# Altium PCB MB1520.PcbDoc (part 3 of 7)
Units mm, origin at the board's own origin, x right, y up, seen from the top; angles counter-clockwise.
Board outline 159 x 88 mm, 6 copper layers (Top Layer, Signal Layer 1, Signal Layer 2, Signal Layer 3, Signal Layer 4, Bottom Layer), stack 1.572 mm thick; 473 components, 377 nets, 1832 pads, 1378 vias.
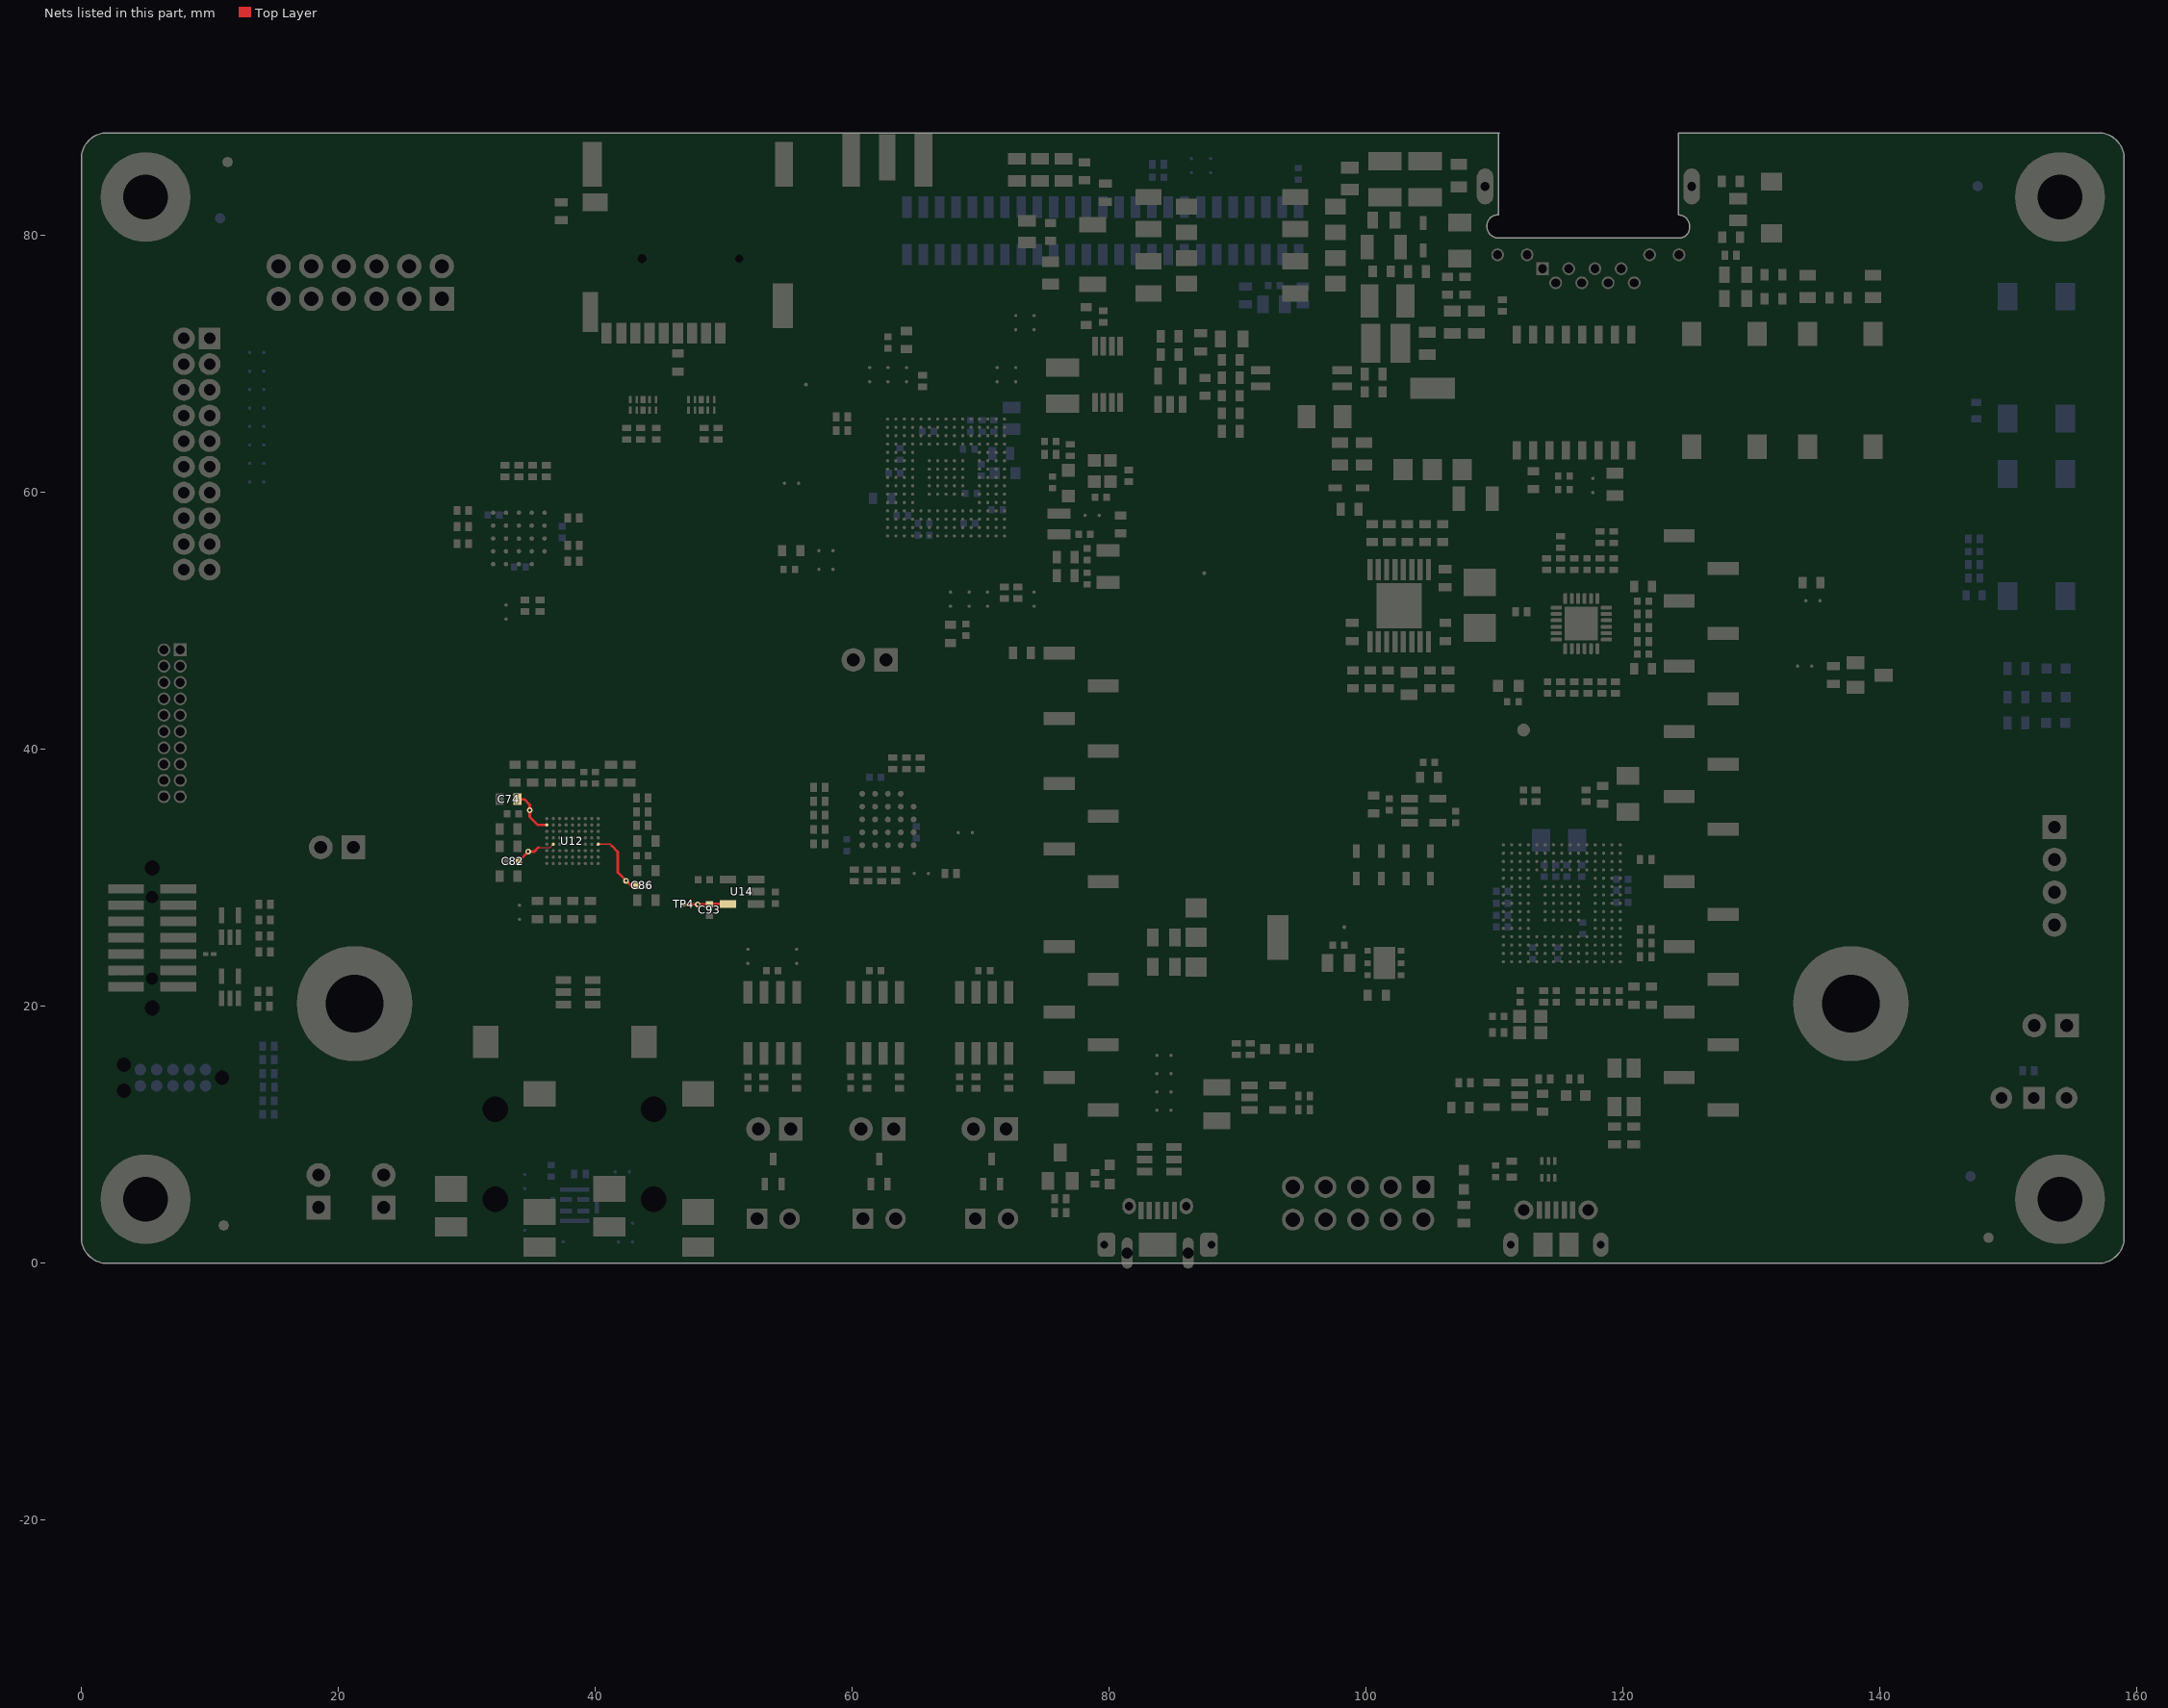
[diagram p6: the nets of this part, all layers, seen from the top]

## Part data (continued)
D8 D9 D10 D11: library part MCD-00034, Manufacturer=STMICROELECTRONICS, BMS_Part_Number=9151097, ComponentLink1Description=Datasheet, ComponentLink1URL=http://tunmcdsvn.tun.st.com/Component_Datasheet_Library/Trunk/Diodes/STM_Diode_BAT60JFILM-SOD323, Internal_Part_Number=MCD-00034, Manufacturer_Part_Number=BAT60JFILM, Part_Type=Diode, Provided_By="SUBCO with ST control", Status=Released
H1 H2 H3 H4: library part MCD-00328, "POSITION HOLE C7D3R5", Manufacturer=n/a, ComponentLink1Description=Datasheet, Internal_Part_Number=MCD-00328, Manufacturer_Part_Number=n/a, Part_Type=Mechanical, Provided_By=n/a, Status=Released
JP1: library part MCD-00683, "Header, 2x1, 2,54mm, VR, TH, Height 5.84mm/2.54mm - Shunt Fitted by default", Manufacturer=SAMTEC, Manufacturer_Part_Number=TSW-102-07-x-S, ComponentLink1Description=Datasheet, ComponentLink1URL=http://tunmcdsvn.tun.st.com/Component_Datasheet_Library/Trunk/Connectors/Samtec_TSW-HTSW-series, Internal_Part_Number=MCD-00683, Part_Type=Connector, Provided_By=SUBCO, Status=Released
JP7: library part MCD-00312, "Header, 5x2, 2.54mm, VR, TH, Height 6mm/3mm", Manufacturer=JIUBABA, Manufacturer_Part_Number=PHFS25-12-10-G0B115-T-1, ComponentLink1Description=Datasheet, ComponentLink1URL=http://tunmcdsvn.tun.st.com/Component_Datasheet_Library/Trunk/Connectors/Jiubaba_PHFS25_12XXXXXXXXX1, ECCN_EU=n/a, ECCN_US=n/a, Internal_Part_Number=MCD-00312, Part_Type=Connector, Provided_By=SUBCO, Status=Released
L1: library part MCD-01109, "Power Inductor, 5.6uH, 0.2R, ME3220-562ML", Manufacturer=COILCRAFT, Manufacturer_Part_Number=ME3220-562ML, ComponentLink1Description=Datasheet, ComponentLink1URL=http://tunmcdsvn.tun.st.com/Component_Datasheet_Library/Trunk/Inductors/CoilCraft_SMT%20Power%20Inductor%20ME3220/CoilCraft_SMT%20Power%20Inductor%20ME3220.pdf, Internal_Part_Number=MCD-01109, Part_Type=Inductor, Provided_By=SUBCO, Status="Footprint available"
L2: library part MCD-01431, "Ferrite Bead 18 ohm@100MHz 0603", Manufacturer="TAIYO YUDEN", Manufacturer_Part_Number=FBMJ1608HM180NTR, Package=L0603, ComponentLink1Description=Datasheet, ComponentLink1URL=http://tunmcdsvn.tun.st.com/Component_Datasheet_Library/Trunk/Inductors/TaiyoYuden_Bead_FBA,%20FBR%20Series/TaiyoYuden_Bead_FBA,%20FBR%20Series.pdf, Internal_Part_Number=MCD-01431, Part_Type=Inductor, Provided_By=SUBCO, Status=Checked
L3: library part MCD-01110, "Inductor 2.2uH, 2x1.6x0.9mm", Manufacturer=MURATA, Manufacturer_Part_Number=LQM2MPN2R2NG0, ComponentLink1Description=Datasheet, ComponentLink1URL=http://tunmcdsvn.tun.st.com/Component_Datasheet_Library/Trunk/Inductors/Murata_inductor_LQM2MPN/Murata_inductor_LQM2MPN.pdf, ECCN_EU=n/a, ECCN_US=n/a, Internal_Part_Number=MCD-01110, Part_Type=Inductor, Provided_By=SUBCO, Status="Footprint available"
L4 L5: library part MCD-00047, "SMD Chip ferrite bead, 600R@100MHz +/-25%, 350mA, 500mohm DC, 0603, T=0.8mm", Manufacturer=TAI-TECH, Manufacturer_Part_Number=FCM1608KF-601T03, ComponentLink1Description=Datasheet, ComponentLink1URL=http://tunmcdsvn.tun.st.com/Component_Datasheet_Library/Trunk/Inductors/TaiTech_Bead_FCM1608_series, Internal_Part_Number=MCD-00047, Part_Type=Inductor, Provided_By=SUBCO, Status=Released
  L4: ECCN_EU=n/a, ECCN_US=n/a
LD1 LD4 LD8: library part MCD-00050, "LED, Green, 0603", Manufacturer=EVERLIGHT, Manufacturer_Part_Number=19-213SYGC/S530-E2/TR8, Package="LED 0603", ComponentLink1Description=Datasheet, ComponentLink1URL=http://tunmcdsvn.tun.st.com/Component_Datasheet_Library/Trunk/Display/Everlight_SMD-LED-GREEN_19-213SYGC-S530-XX-TR8-v3.doc, Internal_Part_Number=MCD-00050, Part_Type=Display, Provided_By=SUBCO, Status=Released
LD2 LD7: library part MCD-00049, "LED, Red, 0603", Manufacturer=EVERLIGHT, Manufacturer_Part_Number=19-213-R6C-AP1Q2B/3T, Package="LED 0603", ComponentLink1Description=Datasheet, ComponentLink1URL=http://tunmcdsvn.tun.st.com/Component_Datasheet_Library/Trunk/Display/Everlight_SMD-LED-RED_19-213-R6C-AP1Q2B-3T-V3.doc, Internal_Part_Number=MCD-00049, Part_Type=Display, Provided_By=SUBCO, Status=Released
LD3: library part MCD-00587, "LED Red, 0603 SMD, 2V Forward Voltage", Alternate_Manufacturer="OSRAM OPTO SEMICONDUCTORS", Alternate_Manufacturer_Part_Number="LS Q976-NR-1", Manufacturer=VISHAY, Manufacturer_Part_Number=VLMS1300-GS08, Package="LED 0603", ComponentLink1Description=Datasheet, ComponentLink1URL=http://tunmcdsvn.tun.st.com/Component_Datasheet_Library/Trunk/Display/VISHAY_LED_RED_VLMS1300-GS08, Internal_Part_Number=MCD-00587, Order_Code_Digikey=VLMS1300-GS08CT-ND, Order_Code_Farnell=2078728, Part_Type=Display, Provided_By=SUBCO, Status=Released
LD5: library part MCD-00589, "LED Green, 0603 SMD, Fw Voltage = 2.8V - 3.6V", Alternate_Manufacturer="OSRAM OPTO SEMICONDUCTORS", Alternate_Manufacturer_Part_Number="LG Q396-PS-35", Manufacturer=VISHAY, Manufacturer_Part_Number=VLMTG1300-GS08, Package="LED 0603", ComponentLink1Description=Datasheet, ComponentLink1URL=http://tunmcdsvn.tun.st.com/Component_Datasheet_Library/Trunk/Display/VISHAY_LED_GREEN_VLMTG1300-GS08, Internal_Part_Number=MCD-00589, Order_Code_Digikey=VLMTG1300-GS08CT-ND, Order_Code_Farnell=2251490, Order_Code_RS=7730452, Part_Type=Display, Provided_By=SUBCO, Status=Checked
LD6: library part MCD-00051, "LED Bicolor", Alternate_Manufacturer=EVERLUCK, Alternate_Manufacturer_Part_Number=LE-RGW35280, Manufacturer="AVAGO TECHNOLOGIES", Manufacturer_Part_Number=HSMF-A201-A00J1, ComponentLink1Description=Datasheet, ComponentLink1URL=http://tunmcdsvn.tun.st.com/Component_Datasheet_Library/Trunk/Display/Avago_LED-SMC_HSMx-A2xx-02Feb2012, Internal_Part_Number=MCD-00051, Part_Type=Display, Provided_By=SUBCO, Status=Released
P1: library part MCD-00308, "Socket, 6x2, 2.54mm, TH, RA, Height 8.51mm/7.62mm", Manufacturer=SAMTEC, Manufacturer_Part_Number=SSW-106-02-F-D-RA, ComponentLink1Description=Datasheet, ComponentLink1URL=http://tunmcdsvn.tun.st.com/Component_Datasheet_Library/Trunk/Connectors/Samtec_SSW_smt_series, Internal_Part_Number=MCD-00308, Part_Type=Connector, Provided_By=SUBCO, Status=Released
P2: library part MCD-00309, "Socket 10x2, 2.00mm, RA, TH, Height 6.35mm/2.29mm", Alternate_Manufacturer=JIUBABA, Alternate_Manufacturer_Part_Number=FH200020C-12300, Manufacturer=SAMTEC, Manufacturer_Part_Number=SQT-110-01-F-D-RA, ComponentLink1Description=Datasheet, ComponentLink1URL=http://tunmcdsvn.tun.st.com/Component_Datasheet_Library/Trunk/Connectors/Samtec_SQT_series, Internal_Part_Number=MCD-00309, Part_Type=Connector, Provided_By=SUBCO, Status=Released
Q1: library part MCD-00073, "NPN Bipolar Transistor", Alternate_Manufacturer="ON SEMICONDUCTOR", Alternate_Manufacturer_Part_Number="MMBT2222ALT1G / MMBT2222ALT3G", Manufacturer_Part_Number=BSR14, ComponentLink1Description=Datasheet, ComponentLink1URL=http://tunmcdsvn.tun.st.com/Component_Datasheet_Library/Trunk/IC/NXP_Transistor_BSR14, Internal_Part_Number=MCD-00073, Manufacturer="ON SEMICONDUCTOR", Part_Type=IC, Provided_By=SUBCO, Status=Released
R1 R10 R11 R18 R33 R42: library part MCD-00179, "Resistor,0R,0805,5%", Manufacturer=YAGEO, Manufacturer_Part_Number=RC0805JR-070RL, Package=R0805, ComponentLink1Description=Datasheet, ComponentLink1URL=http://tunmcdsvn.tun.st.com/Component_Datasheet_Library/Trunk/Resistors/Yageo_Resistor_RC0805-series, Internal_Part_Number=MCD-00179, Part_Type=Resistor, Provided_By=SUBCO, Status=Released
R2 R61 R137 R138 R139: library part MCD-00056, "Resistor,0R,0603,5%,1/10W", Manufacturer=YAGEO, Manufacturer_Part_Number=RC0603JR-070RL, Package=R0603, ComponentLink1Description=Datasheet, ComponentLink1URL=http://tunmcdsvn.tun.st.com/Component_Datasheet_Library/Trunk/Resistors/Yageo_Resistor_RC0603-series, Internal_Part_Number=MCD-00056, Part_Type=Resistor, Status=Released
  R2 R61: Provided_By=SUBCO
  R137 R138: ECCN_EU=n/a, ECCN_US=n/a, Initial_Board_Reference=MB1274, Provided_By=subcon
  R139: ECCN_EU=NEC, ECCN_US=EAR99, Provided_By=SUBCO
R3 R8 R23 R44: library part MCD-00220, "Resistor,10K,0603,1%,1/10W", Manufacturer=YAGEO, Manufacturer_Part_Number=RC0603FR-0710KL, Package=R0603, ComponentLink1Description=Datasheet, ComponentLink1URL=http://tunmcdsvn.tun.st.com/Component_Datasheet_Library/Trunk/Resistors/Yageo_Resistor_RC0603-series, Internal_Part_Number=MCD-00220, Part_Type=Resistor, Provided_By=SUBCO, Status=Released
  R3: ECCN_EU=NEC, ECCN_US=EAR99
R4: library part MCD-01115, "Resistor,68R,0805,1%", Manufacturer=YAGEO, Manufacturer_Part_Number=RC0805FR-0768RL, Package=R0805, ComponentLink1Description=Datasheet, ComponentLink1URL=http://tunmcdsvn.tun.st.com/Component_Datasheet_Library/Trunk/Resistors/Yageo_Resistor_RC0805-series/Yageo_Resistor_RC0805-series.pdf, Internal_Part_Number=MCD-01115, Part_Type=Resistor, Provided_By=SUBCO, Status="Footprint available"
R5: library part MCD-01114, "Resistor,200R,1206,1%", Manufacturer=ROHM, Manufacturer_Part_Number=LTR18EZPF2000, Package=R1206, ComponentLink1Description=Datasheet, ComponentLink1URL=http://tunmcdsvn.tun.st.com/Component_Datasheet_Library/Trunk/Resistors/ROHM_Resistor_LTR-series/ROHM_Resistor_LTR-series.pdf, Internal_Part_Number=MCD-01114, Part_Type=Resistor, Provided_By=SUBCO, Status="Footprint available"
R6 R13 R132 R141: library part MCD-00062, "Resistor,330R,0402,1%,1/16W", Manufacturer=YAGEO, Manufacturer_Part_Number=RC0402FR-07330RL, Package=R0402, ComponentLink1Description=Datasheet, ComponentLink1URL=http://tunmcdsvn.tun.st.com/Component_Datasheet_Library/Trunk/Resistors/Yageo_Resistor_RC0402-series, Internal_Part_Number=MCD-00062, Part_Type=Resistor, Provided_By=SUBCO, Status=Released
R7: library part MCD-01113, "Resistor,15R,0805,1%", Manufacturer=YAGEO, Manufacturer_Part_Number=RC0805FR-0715RL, Package=R0805, ComponentLink1Description=Datasheet, ComponentLink1URL=http://tunmcdsvn.tun.st.com/Component_Datasheet_Library/Trunk/Resistors/Yageo_Resistor_RC0805-series/Yageo_Resistor_RC0805-series.pdf, Internal_Part_Number=MCD-01113, Part_Type=Resistor, Provided_By=SUBCO, Status="Footprint available"
R9 R12 R14 R15: library part MCD-01112, "Resistor,75R,0805,1%", Manufacturer=YAGEO, Manufacturer_Part_Number=RC0805FR-0775RL, Package=R0805, ComponentLink1Description=Datasheet, ComponentLink1URL=http://tunmcdsvn.tun.st.com/Component_Datasheet_Library/Trunk/Resistors/Yageo_Resistor_RC0805-series/Yageo_Resistor_RC0805-series.pdf, Internal_Part_Number=MCD-01112, Part_Type=Resistor, Provided_By=SUBCO, Status="Footprint available"
R16: library part MCD-00166, "Resistor,120K,0402,1%,1/16W", Manufacturer=YAGEO, Manufacturer_Part_Number=RC0402FR-07120KL, Package=R0402, ComponentLink1Description=Datasheet, ComponentLink1URL=http://tunmcdsvn.tun.st.com/Component_Datasheet_Library/Trunk/Resistors/Yageo_Resistor_RC0402-series, Internal_Part_Number=MCD-00166, Part_Type=Resistor, Provided_By=SUBCO, Status="Footprint available"
R17: library part MCD-01111, "Resistor,10R,0805,1%,Stackpole,1/4W", Manufacturer=STACKPOLE, Manufacturer_Part_Number=RNCP0805FTD10R0, Package=R0805, ComponentLink1Description=Datasheet, ComponentLink1URL=http://tunmcdsvn.tun.st.com/Component_Datasheet_Library/Trunk/Resistors/Stackpole_Resisteor_RNCP%20Series/Stackpole_Resisteor_RNCP%20Series.pdf, Internal_Part_Number=MCD-01111, Part_Type=Resistor, Provided_By=SUBCO, Status="Footprint available"
R19 R21: library part MCD-00384, "Resistor,13K,0603,1%,1/10W", Manufacturer=YAGEO, Manufacturer_Part_Number=RC0603FR-0713KL, Package=R0603, ComponentLink1Description=Datasheet, ComponentLink1URL=http://tunmcdsvn.tun.st.com/Component_Datasheet_Library/Trunk/Resistors/Yageo_Resistor_RC0603-series, Internal_Part_Number=MCD-00384, Part_Type=Resistor, Provided_By=SUBCO, Status=Released
R20: library part MCD-00422, "Resistor,20K,0603,1%,1/10W", Manufacturer=YAGEO, Manufacturer_Part_Number=RC0603FR-0720KL, Package=R0603, ComponentLink1Description=Datasheet, ComponentLink1URL=http://tunmcdsvn.tun.st.com/Component_Datasheet_Library/Trunk/Resistors/Yageo_Resistor_RC0603-series, Internal_Part_Number=MCD-00422, Part_Type=Resistor, Provided_By=SUBCO, Status=Released
R22 R26 R72 R134: library part MCD-00070, "Resistor,1K,0603,1%,1/10W", Manufacturer=YAGEO, Manufacturer_Part_Number=RC0603FR-071KL, Package=R0603, ComponentLink1Description=Datasheet, ComponentLink1URL=http://tunmcdsvn.tun.st.com/Component_Datasheet_Library/Trunk/Resistors/Yageo_Resistor_RC0603-series, Internal_Part_Number=MCD-00070, Part_Type=Resistor, Provided_By=SUBCO, Status=Released
R24 R25 R32 R37 R38 R39 R40 R45 R46 R48 R52 R53 R56 R58 R59 R60 R66 R82 R83 R87 R91 R93 R95 R96 R98 R99 R100 R101: library part MCD-00455, "Resistor,33R,0402,1%,1/16W", Manufacturer=YAGEO, Manufacturer_Part_Number=RC0402FR-0733RL, Package=R0402, ComponentLink1Description=Datasheet, ComponentLink1URL=http://tunmcdsvn.tun.st.com/Component_Datasheet_Library/Trunk/Resistors/Yageo_Resistor_RC0402-series, Internal_Part_Number=MCD-00455, Part_Type=Resistor, Provided_By=SUBCO, Status=Released
  R56 R58 R59: ECCN_EU=NEC, ECCN_US=EAR99
R27 R28 R29 R30 R31 R117 R125 R135: library part MCD-00063, "Resistor,47K,0402,1%,1/16W", Manufacturer=YAGEO, Manufacturer_Part_Number=RC0402FR-0747KL, Package=R0402, ComponentLink1Description=Datasheet, ComponentLink1URL=http://tunmcdsvn.tun.st.com/Component_Datasheet_Library/Trunk/Resistors/Yageo_Resistor_RC0402-series, Internal_Part_Number=MCD-00063, Part_Type=Resistor, Provided_By=SUBCO, Status=Released
R34: library part MCD-01118, "Resistor,56R,0805,1%", Manufacturer=YAGEO, Manufacturer_Part_Number=RC0805FR-0756RL, Package=R0805, ComponentLink1Description=Datasheet, ComponentLink1URL=http://tunmcdsvn.tun.st.com/Component_Datasheet_Library/Trunk/Resistors/Yageo_Resistor_RC0805-series/Yageo_Resistor_RC0805-series.pdf, Internal_Part_Number=MCD-01118, Part_Type=Resistor, Provided_By=SUBCO, Status="Footprint available"
R35 R36: library part MCD-00485, "Resistor,51R,0402,1%,1/16W", Manufacturer=YAGEO, Manufacturer_Part_Number=RC0402FR-0751RL, Package=R0402, ComponentLink1Description=Datasheet, ComponentLink1URL=http://tunmcdsvn.tun.st.com/Component_Datasheet_Library/Trunk/Resistors/Yageo_Resistor_RC0402-series, Internal_Part_Number=MCD-00485, Part_Type=Resistor, Provided_By=SUBCO, Status=Released
R41 R49 R50 R51 R57 R63 R64 R65 R67 R70 R71 R81 R94 R102 R105 R115 R120 R122 R124 R127 R129 R149 R154: library part MCD-00053, "Resistor,10K,0402,1%,1/16W", Manufacturer=YAGEO, Manufacturer_Part_Number=RC0402FR-0710KL, Package=R0402, ComponentLink1Description=Datasheet, ComponentLink1URL=http://tunmcdsvn.tun.st.com/Component_Datasheet_Library/Trunk/Resistors/Yageo_Resistor_RC0402-series, Internal_Part_Number=MCD-00053, Part_Type=Resistor, Provided_By=SUBCO, Status=Released
  R49 R50 R51 R57 R65 R67 R81 R102: ECCN_EU=NEC, ECCN_US=EAR99
R43: library part MCD-01119, "Resistor,0.47R,1206,1%", Manufacturer=YAGEO, Manufacturer_Part_Number=RL1206FR-070R47L, Package=R1206, ComponentLink1Description=Datasheet, ComponentLink1URL=http://tunmcdsvn.tun.st.com/Component_Datasheet_Library/Trunk/Resistors/Yageo_Resistor_RL-series/Yageo_Resistor_RL-series.pdf, Internal_Part_Number=MCD-01119, Part_Type=Resistor, Provided_By=SUBCO, Status="Footprint available"
R47 R144 R145: library part MCD-00225, "Resistor,510R,0603,1%,1/10W", Manufacturer=YAGEO, Manufacturer_Part_Number=RC0603FR-07510RL, Package=R0603, ComponentLink1Description=Datasheet, ComponentLink1URL=http://tunmcdsvn.tun.st.com/Component_Datasheet_Library/Trunk/Resistors/Yageo_Resistor_RC0603-series, Internal_Part_Number=MCD-00225, Part_Type=Resistor, Provided_By=SUBCO, Status=Released
R54 R62: library part MCD-00181, "Resistor,0R,0603,ULO", Manufacturer=ROHM, Manufacturer_Part_Number=PMR03EZPJ000, Package=R0603, ComponentLink1Description=Datasheet, ComponentLink1URL=http://tunmcdsvn.tun.st.com/Component_Datasheet_Library/Trunk/Resistors/ROHM_ULtra_low_Ohmic_Resistor_PMR10EZPJ000, Internal_Part_Number=MCD-00181, Part_Type=Resistor, Provided_By=SUBCO, Status=Released
R55 R90 R92: library part MCD-00068, "Resistor,1K5,0402,1%,1/16W", Manufacturer=YAGEO, Manufacturer_Part_Number=RC0402FR-071K5L, Package=R0402, ComponentLink1Description=Datasheet, ComponentLink1URL=http://tunmcdsvn.tun.st.com/Component_Datasheet_Library/Trunk/Resistors/Yageo_Resistor_RC0402-series, Internal_Part_Number=MCD-00068, Part_Type=Resistor, Provided_By=SUBCO, Status=Released
  R55: ECCN_EU=NEC, ECCN_US=EAR99
R68 R88 R97 R111 R140 R146: library part MCD-00119, "Resistor,100R,0402,1%,1/16W", Manufacturer=YAGEO, Manufacturer_Part_Number=RC0402FR-07100RL, Package=R0402, ComponentLink1Description=Datasheet, ComponentLink1URL=http://tunmcdsvn.tun.st.com/Component_Datasheet_Library/Trunk/Resistors/Yageo_Resistor_RC0402-series, Internal_Part_Number=MCD-00119, Part_Type=Resistor, Provided_By=SUBCO, Status=Released
R69: library part MCD-01116, "Resistor,124K,0603,1%", Manufacturer=YAGEO, Manufacturer_Part_Number=RC0603FR-07124KL, Package=R0603, ComponentLink1Description=Datasheet, ComponentLink1URL=http://tunmcdsvn.tun.st.com/Component_Datasheet_Library/Trunk/Resistors/Yageo_Resistor_RC0603-series/Yageo_Resistor_RC0603-series.pdf, Internal_Part_Number=MCD-01116, Part_Type=Resistor, Provided_By=SUBCO, Status="Footprint available"
R73: library part MCD-00257, "Resistor,1M,0603,1%,1/10W", Manufacturer=YAGEO, Manufacturer_Part_Number=RC0603FR-071ML, Package=R0603, ComponentLink1Description=Datasheet, ComponentLink1URL=http://tunmcdsvn.tun.st.com/Component_Datasheet_Library/Trunk/Resistors/Yageo_Resistor_RC0603-series, Internal_Part_Number=MCD-00257, Part_Type=Resistor, Provided_By=SUBCO, Status=Released
R74: library part MCD-01117, "Resistor,2K,0805,1%", Manufacturer=YAGEO, Manufacturer_Part_Number=RC0805FR-072KL, Package=R0805, ComponentLink1Description=Datasheet, ComponentLink1URL=http://tunmcdsvn.tun.st.com/Component_Datasheet_Library/Trunk/Resistors/Yageo_Resistor_RC0805-series/Yageo_Resistor_RC0805-series.pdf, Internal_Part_Number=MCD-01117, Part_Type=Resistor, Provided_By=SUBCO, Status="Footprint available"
R75: library part MCD-00522, "Resistor,75K,0603,1%,1/10W", Manufacturer=YAGEO, Manufacturer_Part_Number=RC0603FR-0775KL, Package=R0603, ComponentLink1Description=Datasheet, ComponentLink1URL=http://tunmcdsvn.tun.st.com/Component_Datasheet_Library/Trunk/Resistors/Yageo_Resistor_RC0603-series, Internal_Part_Number=MCD-00522, Part_Type=Resistor, Provided_By=SUBCO, Status=Released
R76 R77 R78 R79: library part MCD-00565, "Resistor,49R9,0402,1%,1/16W", Manufacturer=YAGEO, Manufacturer_Part_Number=RC0402FR-0749R9L, Package=R0402, ComponentLink1Description=Datasheet, ComponentLink1URL=http://tunmcdsvn.tun.st.com/Component_Datasheet_Library/Trunk/Resistors/Yageo_Resistor_RC0402-series, Internal_Part_Number=MCD-00565, Part_Type=Resistor, Provided_By=SUBCO, Status=Released
R80: library part MCD-00723, "Resistor,12K1,0402,1%,1/16W", Manufacturer=YAGEO, Manufacturer_Part_Number=RC0402FR-0712K1L, Package=R0402, ComponentLink1Description=Datasheet, ComponentLink1URL=http://tunmcdsvn.tun.st.com/Component_Datasheet_Library/Trunk/Resistors/Yageo_Resistor_RC0402-series, ECCN_EU=NEC, ECCN_US=EAR99, Internal_Part_Number=MCD-00723, Part_Type=Resistor, Provided_By=SUBCO, Status=Released
R84 R85: library part MCD-00345, "Resistor,20R,0603,1%,1/10W", Manufacturer=YAGEO, Manufacturer_Part_Number=RC0603FR-0720RL, Package=R0603, ComponentLink1Description=Datasheet, ComponentLink1URL=http://tunmcdsvn.tun.st.com/Component_Datasheet_Library/Trunk/Resistors/Yageo_Resistor_RC0603-series, Internal_Part_Number=MCD-00345, Part_Type=Resistor, Provided_By=SUBCO, Status=Released
R86: library part MCD-00219, "Resistor,4K7,0603,1%,1/10W", Manufacturer=YAGEO, Manufacturer_Part_Number=RC0603FR-074K7L, Package=R0603, ComponentLink1Description=Datasheet, ComponentLink1URL=http://tunmcdsvn.tun.st.com/Component_Datasheet_Library/Trunk/Resistors/Yageo_Resistor_RC0603-series, Internal_Part_Number=MCD-00219, Part_Type=Resistor, Provided_By=SUBCO, Status=Released
R89: library part MCD-00185, "Resistor,3K,0402,1%,1/16W", Manufacturer=YAGEO, Manufacturer_Part_Number=RC0402FR-073KL, Package=R0402, ComponentLink1Description=Datasheet, ComponentLink1URL=http://tunmcdsvn.tun.st.com/Component_Datasheet_Library/Trunk/Resistors/Yageo_Resistor_RC0402-series, Internal_Part_Number=MCD-00185, Part_Type=Resistor, Provided_By=SUBCO, Status=Released
R103 R104 R106 R108 R110 R114 R147 R148 R150 R151 R152 R153: library part MCD-00189, "Resistor,22R,0402,1%,1/16W", Manufacturer=YAGEO, Manufacturer_Part_Number=RC0402FR-0722RL, Package=R0402, ComponentLink1Description=Datasheet, ComponentLink1URL=http://tunmcdsvn.tun.st.com/Component_Datasheet_Library/Trunk/Resistors/Yageo_Resistor_RC0402-series, Internal_Part_Number=MCD-00189, Part_Type=Resistor, Provided_By=SUBCO, Status=Released
R107: library part MCD-00055, "Resistor,2K7,0402,1%,1/16W", Manufacturer=YAGEO, Manufacturer_Part_Number=RC0402FR-072K7L, Package=R0402, ComponentLink1Description=Datasheet, ComponentLink1URL=http://tunmcdsvn.tun.st.com/Component_Datasheet_Library/Trunk/Resistors/Yageo_Resistor_RC0402-series, Internal_Part_Number=MCD-00055, Part_Type=Resistor, Provided_By=SUBCO, Status=Released
R109 R112 R113: library part MCD-00065, "Resistor,4K7,0402,1%,1/16W", Alternate_Manufacturer=YAGEO, Alternate_Manufacturer_Part_Number=RT0402FRE074K7L, Manufacturer_Part_Number=RC0402FR-074K7L, Package=R0402, ComponentLink1Description=Datasheet, ComponentLink1URL=http://tunmcdsvn.tun.st.com/Component_Datasheet_Library/Trunk/Resistors/Yageo_Resistor_RC0402-series, Internal_Part_Number=MCD-00065, Manufacturer=YAGEO, Part_Type=Resistor, Provided_By=SUBCO, Status=Released
R116 R128 R136: library part MCD-00052, "Resistor,0R,0402,5%,1/16W", Manufacturer=YAGEO, Manufacturer_Part_Number=RC0402JR-070RL, Package=R0402, ComponentLink1Description=Datasheet, ComponentLink1URL=http://tunmcdsvn.tun.st.com/Component_Datasheet_Library/Trunk/Resistors/Yageo_Resistor_RC0402-series, Internal_Part_Number=MCD-00052, Part_Type=Resistor, Provided_By=SUBCO, Status=Released
  R136: ECCN_EU=NEC, ECCN_US=EAR99
R118: library part MCD-00499, "Resistor,620R,0402,1%,1/16W", Manufacturer=YAGEO, Manufacturer_Part_Number=RC0402FR-07620RL, Package=R0402, ComponentLink1Description=Datasheet, ComponentLink1URL=http://tunmcdsvn.tun.st.com/Component_Datasheet_Library/Trunk/Resistors/Yageo_Resistor_RC0402-series, Internal_Part_Number=MCD-00499, Part_Type=Resistor, Provided_By=SUBCO, Status=Released
R119 R121 R123: library part MCD-00194, "Resistor,120R,0402,1%,1/16W", Manufacturer=YAGEO, Manufacturer_Part_Number=RC0402FR-07120RL, Package=R0402, ComponentLink1Description=Datasheet, ComponentLink1URL=http://tunmcdsvn.tun.st.com/Component_Datasheet_Library/Trunk/Resistors/Yageo_Resistor_RC0402-series, Internal_Part_Number=MCD-00194, Part_Type=Resistor, Provided_By=SUBCO, Status=Released
R126: library part MCD-00061, "Resistor,1K,0402,1%,1/16W", Manufacturer=YAGEO, Manufacturer_Part_Number=RC0402FR-071KL, Package=R0402, ComponentLink1Description=Datasheet, ComponentLink1URL=http://tunmcdsvn.tun.st.com/Component_Datasheet_Library/Trunk/Resistors/Yageo_Resistor_RC0402-series, Internal_Part_Number=MCD-00061, Part_Type=Resistor, Provided_By=SUBCO, Status=Released
R130 R131: library part MCD-00197, "Resistor,330R,0603,1%,1/10W", Manufacturer=YAGEO, Manufacturer_Part_Number=RC0603FR-07330RL, Package=R0603, BMS_Part_Number=9129729, ComponentLink1Description=Datasheet, ComponentLink1URL=http://tunmcdsvn.tun.st.com/Component_Datasheet_Library/Trunk/Resistors/Yageo_Resistor_RC0603-series, Internal_Part_Number=MCD-00197, Part_Type=Resistor, Provided_By=SUBCO, Status=Released
R133: library part MCD-00429, "Resistor,22K,0402,1%,1/16W", Manufacturer=YAGEO, Manufacturer_Part_Number=RC0402FR-0722KL, Package=R0402, ComponentLink1Description=Datasheet, ComponentLink1URL=http://tunmcdsvn.tun.st.com/Component_Datasheet_Library/Trunk/Resistors/Yageo_Resistor_RC0402-series, Internal_Part_Number=MCD-00429, Part_Type=Resistor, Provided_By=SUBCO, Status=Released
R142: library part MCD-00164, "Resistor,220K,0402,1%,1/16W", Manufacturer=YAGEO, Manufacturer_Part_Number=RC0402FR-07220KL, Package=R0402, ComponentLink1Description=Datasheet, ComponentLink1URL=http://tunmcdsvn.tun.st.com/Component_Datasheet_Library/Trunk/Resistors/Yageo_Resistor_RC0402-series, Internal_Part_Number=MCD-00164, Part_Type=Resistor, Provided_By=SUBCO, Status=Checked
R143: library part MCD-00508, "Resistor,680R,0603,1%,1/10W", Manufacturer=YAGEO, Manufacturer_Part_Number=RC0603FR-07680RL, Package=R0603, ComponentLink1Description=Datasheet, ComponentLink1URL=http://tunmcdsvn.tun.st.com/Component_Datasheet_Library/Trunk/Resistors/Yageo_Resistor_RC0603-series, ECCN_EU=NEC, ECCN_US=EAR99, Internal_Part_Number=MCD-00508, Part_Type=Resistor, Provided_By=SUBCO, Status=Released
SB1 SB2 SB3 SB4 SB5 SB6 SB7 SB8 SB9 SB10 SB11 SB12 SB13 SB14 SB15 SB16 SB17 SB18 SB19 SB20 SB21 SB22 SB23 SB24 SB25 SB26 SB27 SB28 SB29 SB30 SB31 SB32 SB33 SB34 SB35 SB36 SB37 SB38 SB39 SB40 SB41 SB42 SB43 SB44: library part MCD-00071, "Solder Bridge ON", Manufacturer=YAGEO, Manufacturer_Part_Number=RC0603JR-070RL, Package=SB0603, ComponentLink1Description=Datasheet, ComponentLink1URL=http://tunmcdsvn.tun.st.com/Component_Datasheet_Library/Trunk/Resistors/Yageo_Resistor_RC0603-series, Internal_Part_Number=MCD-00071, Part_Type=Mechanical, Provided_By=SUBCO, Status=Released
  SB24 SB26 SB27: ECCN_EU=n/a, ECCN_US=n/a
SW1: library part MCD-00566, "Mechanical Slide Switches 1K2 BLK ACT GOLD STRT MNT", Manufacturer=EAO, Manufacturer_Part_Number=09.03290.01, ComponentLink1Description=Datasheet, ComponentLink1URL=http://tunmcdsvn.tun.st.com/Component_Datasheet_Library/Trunk/Misc/EAO_SWITCH_09.03290.01, ECCN_EU=n/a, ECCN_US=n/a, Internal_Part_Number=MCD-00566, Part_Type=Misc, Provided_By=SUBCO, Status=Checked
T1: library part MCD-01063, "Flyback Transformers for 3 Watt, PoE applications", Manufacturer=WURTH, Manufacturer_Part_Number=750315923, ComponentLink1Description=Datasheet, ComponentLink1URL=http://tunmcdsvn.tun.st.com/Component_Datasheet_Library/Trunk/IC/Wurth_Transformer_750315923/Wurth_Transformer_750315923.pdf, Internal_Part_Number=MCD-01063, Part_Type=IC, Provided_By=SUBCO, Status="Footprint available"
T2: library part MCD-01081, "Flyback Transformers for 3 Watt, PoE applications, CoilCraft Cyntec", Manufacturer=COILCRAFT, ComponentLink1Description=Datasheet, ComponentLink1URL=http://tunmcdsvn.tun.st.com/Component_Datasheet_Library/Trunk/IC/CoilCraft_Transformer_POE30P-50L/CoilCraft_Transformer_POE30P-50L.pdf, Internal_Part_Number=MCD-01081, Manufacturer_Part_Number=POE30P-50L, Part_Type=IC, Provided_By=SUBCO, Status="Footprint available"
T3: library part MCD-01067, "10/100BASE-TX VoIP Magnetics Modules, Data Transformer", Manufacturer=PULSE, ComponentLink1Description=Datasheet, ComponentLink1URL=http://tunmcdsvn.tun.st.com/Component_Datasheet_Library/Trunk/IC/Pulse_Transformer_H2019NL/Pulse_Transformer_H2019NL.pdf, Internal_Part_Number=MCD-01067, Manufacturer_Part_Number=H2019NL, Part_Type=IC, Provided_By=SUBCO, Status="Footprint available"
T4: library part MCD-01086, "Annel 200 V, 1.1ohm, 1 A, low gate charge STripFET II, Power MOSFET", Manufacturer=STMICROELECTRONICS, Package=SOT-223, BMS_Part_Number=9153018, ComponentLink1Description=Datasheet, ComponentLink1URL=http://tunmcdsvn.tun.st.com/Component_Datasheet_Library/Trunk/IC/STM_N-channel_MOSFET_STN4NF20/STM_N-channel_MOSFET_STN4NF20L.pdf, Internal_Part_Number=MCD-01086, Manufacturer_Part_Number=STN4NF20L, Part_Type=IC, Provided_By="SUBCO with ST control", Status="Footprint available"
T5: library part MCD-00151, "N-channel enhancement mode field-effect transistor", Manufacturer=NXP, ComponentLink1Description=Datasheet, ComponentLink1URL=http://tunmcdsvn.tun.st.com/Component_Datasheet_Library/Trunk/IC/NXP_Transistor_BSN20BK_SOT23, Internal_Part_Number=MCD-00151, Manufacturer_Part_Number=BSN20, Part_Type=IC, Provided_By=SUBCO, Status=Released
TP1 TP2 TP4 TP5: library part MCD-00630, "Test Point 0.3mm", ComponentLink1Description=Datasheet, Internal_Part_Number=MCD-00630, Part_Type=Mechanical, Provided_By=n/a, Status=Released
TP3: library part MCD-00074, "Test Point 1mm", Manufacturer=n/a, ComponentLink1Description=Datasheet, ComponentLink1URL=http://na, ECCN_EU=n/a, ECCN_US=n/a, Initial_Board_Reference=MB1274, Internal_Part_Number=MCD-00074, Manufacturer_Part_Number=n/a, Part_Type=Mechanical, Provided_By=n/a, Status=Released
U1: library part MCD-01138, "IC VREF SERIES 2.5V 8VSSOP", Manufacturer=TI, Package=VSSOP8, ComponentLink1Description=Datasheet, ComponentLink1URL=http://tunmcdsvn.tun.st.com/Component_Datasheet_Library/Trunk/IC/TI_REF_REF6225IDGKT/TI_REF_REF6225IDGKT.pdf, Internal_Part_Number=MCD-01138, Manufacturer_Part_Number=REF6225IDGKT, Part_Type=IC, Provided_By=SUBCO, Status="Footprint available"
U2: library part MCD-01068, "OPTOISOLATOR 3.7KV TRANSISTOR 4SMD", Manufacturer=FAIRCHILD, ComponentLink1Description=Datasheet, ComponentLink1URL=http://tunmcdsvn.tun.st.com/Component_Datasheet_Library/Trunk/IC/Fairchild_Optocoupler_HMHA2801/Fairchild_Optocoupler_HMHA2801.pdf, Internal_Part_Number=MCD-01068, Manufacturer_Part_Number=HMHA2801A, Part_Type=IC, Provided_By=SUBCO, Status="Footprint available"
U3: library part MCD-01089, "Low voltage adjustable shunt reference", Manufacturer=STMICROELECTRONICS, Package=SOT23-5, BMS_Part_Number=9177032, ComponentLink1Description=Datasheet, ComponentLink1URL=http://tunmcdsvn.tun.st.com/Component_Datasheet_Library/Trunk/IC/STM_shunt%20voltage%20reference_TS431AILT/STM_shunt%20voltage%20reference_TS431AILT.pdf, Internal_Part_Number=MCD-01089, Manufacturer_Part_Number=TS431AILT, Part_Type=IC, Provided_By="SUBCO with ST control", Status="Footprint available"
U4 U5: library part MCD-00667, "4-line ESD protection for high speed lines", Manufacturer=STMICROELECTRONICS, Package=uQFN-10L, BMS_Part_Number=9179041, ComponentLink1Description=Datasheet, ComponentLink1URL=http://tunmcdsvn.tun.st.com/Component_Datasheet_Library/Trunk/Diodes/STM_ESD_HSP051-4M10, ECCN_EU=NEC, ECCN_US=EAR99, Internal_Part_Number=MCD-00667, Manufacturer_Part_Number=HSP051-4M10, Part_Type=Diode, Provided_By="SUBCO with ST control", Status=Checked
U6: library part MCD-01673, "STM32H725IGK6 MCU, Cut1.0, 10x10x0.6mm, Pitch0.65mm, Int SMPS", Manufacturer=STMICROELECTRONICS, Manufacturer_Part_Number=STM32H725IGK6, Package=UFBGA176+25, ComponentLink1Description=Datasheet, ComponentLink1URL=http://tunmcdsvn.tun.st.com/Component_Datasheet_Library/Trunk/IC/STM_MCU_STM32H725IGK6U_UFBGA176, ECCN_EU=NEC, ECCN_US=3A991A2, Internal_Part_Number=MCD-01673, Part_Type=IC, Provided_By="SUBCO with ST control", Status=Checked
U7: library part MCD-01824, "Memory, HyperRAM,128Mb,100MHz,3V,BGA24", Manufacturer=CYPRESS, Package=FBGA24, ComponentLink1Description=Datasheet, ComponentLink1URL=http://tunmcdsvn.tun.st.com/Component_Datasheet_Library/Trunk/IC/Cypress_HyperRAM_S70KL1281DABHI023/Cypress_HyperRAM_S70KL1281DABHI023.pdf, ECCN_EU=n/a, ECCN_US=n/a, Internal_Part_Number=MCD-01824, Manufacturer_Part_Number=S70KL1281DABHI023, Part_Type=IC, Provided_By=SUBCO, Status=Checked
U8: library part MCD-01080, "Integrated IEEE 802.3af compliant PoE-PD interface, and PWM controller with support of external source", Manufacturer=STMICROELECTRONICS, Package=HTSSOP16, BMS_Part_Number=9177966, ComponentLink1Description=Datasheet, ComponentLink1URL=http://tunmcdsvn.tun.st.com/Component_Datasheet_Library/Trunk/IC/STM_PWM%20Controller_PM8800ATR/STM_PWM%20Controller_PM8800ATR.pdf, Internal_Part_Number=MCD-01080, Manufacturer_Part_Number=PM8800ATR, Part_Type=IC, Provided_By="SUBCO with ST control", Status="Footprint available"
U9: library part MCD-00719, "10/100M RMII Ethernet transceiver", Manufacturer=MICROCHIP, ComponentLink1Description=Datasheet, ComponentLink1URL=http://tunmcdsvn.tun.st.com/Component_Datasheet_Library/Trunk/IC/MICROCHIP_LAN8742A_RMII_PHY, ECCN_EU=n/a, ECCN_US=n/a, Internal_Part_Number=MCD-00719, Manufacturer_Part_Number=LAN8742A-CZ-TR, Part_Type=IC, Provided_By=SUBCO, Status=Released
U10: library part MCD-00246, "Memory,Octo-SPI-NOR,512Mb,2048x16,133MHz,3V,DTR,BGA24, CMOS MXSMIO", Manufacturer=MACRONIX, Package=BGA24, ComponentLink1Description=Datasheet, ComponentLink1URL=http://tunmcdsvn.tun.st.com/Component_Datasheet_Library/Trunk/IC/Macronix_OctoSPI_NOR_512Mb_MX25LM51245GXDI0A/Macronix_OctoSPI_NOR_512Mb_MX25LM51245G-0.02_Nov22.pdf, ECCN_EU=tbd, ECCN_US=tbd, Internal_Part_Number=MCD-00246, Manufacturer_Part_Number=MX25LM51245GXDI00, Part_Type=IC, Provided_By=SUBCO, Status=Released
U11: library part MCD-00086, "Ultra low drop-low noise BiCMOS voltage, regulators low ESR capacitors compatible", Manufacturer=STMICROELECTRONICS, BMS_Part_Number=9176161, ComponentLink1Description=Datasheet, ComponentLink1URL=http://tunmcdsvn.tun.st.com/Component_Datasheet_Library/Trunk/IC/STM_LDO_LD3985, Internal_Part_Number=MCD-00086, Manufacturer_Part_Number=LD3985M33R, Part_Type=IC, Provided_By="SUBCO with ST control", Status=Released
U12: library part MCD-00079, "Multi-Channel Audio Hub CODEC for Smartphones", Manufacturer="CIRRUS LOGIC", ComponentLink1Description=Datasheet, ComponentLink1URL=http://tunmcdsvn.tun.st.com/Component_Datasheet_Library/Trunk/IC/Wolfson_AudioCodec_WM8994, Internal_Part_Number=MCD-00079, Manufacturer_Part_Number=WM8994ECS/R, Part_Type=IC, Provided_By=SUBCO, Status=Released
U13: library part MCD-00596, "STM32F723IEK  (STM32F7) BGA176", Manufacturer=STMICROELECTRONICS, Manufacturer_Part_Number=STM32F723IEK6, BMS_Part_Number=9175300, ComponentLink1Description=Datasheet, ComponentLink1URL=http://tunmcdsvn.tun.st.com/Component_Datasheet_Library/Trunk/IC/BGA176+25L_10x10x0.6_pitch0.65, Internal_Part_Number=MCD-00596, Part_Type=IC, Provided_By="SUBCO with ST control", Status=Released
U14: library part MCD-00078, "Ultra low drop-low noise BiCMOS voltage, regulators low ESR capacitors compatible", Manufacturer=STMICROELECTRONICS, BMS_Part_Number=9176159, ComponentLink1Description=Datasheet, ComponentLink1URL=http://tunmcdsvn.tun.st.com/Component_Datasheet_Library/Trunk/IC/STM_LDO_LD3985, ECCN_EU=NEC, ECCN_US=EAR99, Internal_Part_Number=MCD-00078, Manufacturer_Part_Number=LD3985M18R, Part_Type=IC, Provided_By="SUBCO with ST control", Status=Released
U15: library part MCD-00088, "IC REG LDO 5V 0.8A SOT223", Manufacturer=STMICROELECTRONICS, Package=SOT-223, BMS_Part_Number=9176133, ComponentLink1Description=Datasheet, ComponentLink1URL=http://tunmcdsvn.tun.st.com/Component_Datasheet_Library/Trunk/IC/STM_LDO_LD1117, Internal_Part_Number=MCD-00088, Manufacturer_Part_Number=LD1117S50TR, Part_Type=IC, Provided_By="SUBCO with ST control", Status=Released
U16 U18: library part MCD-00136, "Dual Transil array for ESD protection", Manufacturer=STMICROELECTRONICS, BMS_Part_Number=9151112, ComponentLink1Description=Datasheet, ComponentLink1URL=http://tunmcdsvn.tun.st.com/Component_Datasheet_Library/Trunk/Diodes/STM_ESD_ESDALC6V1W5, Internal_Part_Number=MCD-00136, Manufacturer_Part_Number=ESDALC6V1W5, Part_Type=Diode, Provided_By="SUBCO with ST control", Status=Released
U17: library part MCD-01127, "IC REG LDO 3.3V 1.3A 6DFN", Manufacturer=STMICROELECTRONICS, Package=DFN6, BMS_Part_Number=9176247, ComponentLink1Description=Datasheet, ComponentLink1URL=http://tunmcdsvn.tun.st.com/Component_Datasheet_Library/Trunk/IC/STM_LDO_ST1L05CPU33R/STM_LDO_ST1L05CPU33R.pdf, Internal_Part_Number=MCD-01127, Manufacturer_Part_Number=ST1L05APU33R, Part_Type=IC, Provided_By="SUBCO with ST control", Status="Footprint available"
U19: library part MCD-00247, "Quad Bidir ESD protection", Manufacturer=STMICROELECTRONICS, BMS_Part_Number=9179038, ComponentLink1Description=Datasheet, ComponentLink1URL=http://tunmcdsvn.tun.st.com/Component_Datasheet_Library/Trunk/Diodes/STM_ESD_ESDA6V1BC6, Internal_Part_Number=MCD-00247, Manufacturer_Part_Number=ESDA6V1BC6, Part_Type=Diode, Provided_By="SUBCO with ST control", Status=Released
U20 U21 U22: library part MCD-00129, "High-Speed CAN Flexible Data Rate Transceiver", Manufacturer=MICROCHIP, Manufacturer_Part_Number=MCP2562FDT-H/SN, ComponentLink1Description=Datasheet, ComponentLink1URL="http://tunmcdsvn.tun.st.com/Component_Datasheet_Library/Trunk/IC/Microchip_CAN Transceiver_MCP2562FD", Internal_Part_Number=MCD-00129, Part_Type=IC, Provided_By=SUBCO, Status=Released
U23 U24: library part MCD-00159, "500mA, Enhanced single channel power switches with active high enable pin", Alternate_Manufacturer="TEXAS INSTRUMENTS", Alternate_Manufacturer_Part_Number=TPS2051C, Manufacturer=STMICROELECTRONICS, BMS_Part_Number=9159009, ComponentLink1Description=Datasheet, ComponentLink1URL=http://tunmcdsvn.tun.st.com/Component_Datasheet_Library/Trunk/IC/STM_PWR-Switch_STMPS2151STR, Internal_Part_Number=MCD-00159, Manufacturer_Part_Number=STMPS2151STR, Part_Type=IC, Provided_By="SUBCO with ST control", Status=Released
U25: library part MCD-00250, "Very low capacitance ESD protection , 4 lines", Manufacturer=STMICROELECTRONICS, BMS_Part_Number=9151001, ComponentLink1Description=Datasheet, ComponentLink1URL=http://tunmcdsvn.tun.st.com/Component_Datasheet_Library/Trunk/Diodes/STM_ESD_USBLC6-4SC6, Internal_Part_Number=MCD-00250, Manufacturer_Part_Number=USBLC6-4SC6, Part_Type=IC, Provided_By="SUBCO with ST control", Status=Released
U26 U27 U28: library part MCD-01358, "Automotive dual-line Transil, transient voltage suppressor (TVS) for CAN bus 36V. Compliant with interfaces in automotive: CAN-FD, LIN, FlexRay, MOST, SENT, USB", Manufacturer=STMICROELECTRONICS, Manufacturer_Part_Number=ESDCAN05-2BWY, Package=SOT323-3L, BMS_Part_Number=9179021, ComponentLink1Description=Datasheet, ComponentLink1URL=http://tunmcdsvn.tun.st.com/Component_Datasheet_Library/Trunk/Diodes/STM_ESD_ESDCAN02-2BWY, ECCN_EU=NEC, ECCN_US=EAR99, Internal_Part_Number=MCD-01358, Part_Type=Diode, Provided_By="SUBCO with ST control", Status=Released
U29: library part MCD-00649, "Common mode filter with ESD protection for USB 2.0 interface", Manufacturer=STMICROELECTRONICS, BMS_Part_Number=9151138, ComponentLink1Description=Datasheet, ComponentLink1URL=http://tunmcdsvn.tun.st.com/Component_Datasheet_Library/Trunk/Diodes/STM_ESD_ECMF02-2AMX6, Internal_Part_Number=MCD-00649, Manufacturer_Part_Number=ECMF02-2AMX6, Part_Type=Diode, Provided_By="SUBCO with ST control", Status=Released
U30 U31 U32: library part MCD-00251, "High power transient voltage suppressor, 7V breakdown", Manufacturer=STMICROELECTRONICS, Manufacturer_Part_Number=ESDA7P60-1U1M, BMS_Part_Number=9179042, ComponentLink1Description=Datasheet, ComponentLink1URL=http://tunmcdsvn.tun.st.com/Component_Datasheet_Library/Trunk/Diodes/STM_ESD_ESDA7P60-1U1M, Internal_Part_Number=MCD-00251, Part_Type=Diode, Provided_By="SUBCO with ST control", Status=Released
U33: library part MCD-00081, "MEMS audio sensor, omnidirectional digital microphone", Manufacturer=STMICROELECTRONICS, BMS_Part_Number=9188008, ComponentLink1Description=Datasheet, ComponentLink1URL=http://tunmcdsvn.tun.st.com/Component_Datasheet_Library/Trunk/IC/STM_Digital-Microphone_MP34DT01TR_M, Internal_Part_Number=MCD-00081, Manufacturer_Part_Number=MP34DT01TR-M, Part_Type=IC, Provided_By="SUBCO with ST control", Status="NRND (Not Recommended for New Design)"
U34: library part MCD-00170, "ESD protection 6V1", Manufacturer=STMICROELECTRONICS, Manufacturer_Part_Number=ESDALC6V1-1U2, BMS_Part_Number=9151132, ComponentLink1Description=Datasheet, ComponentLink1URL=http://tunmcdsvn.tun.st.com/Component_Datasheet_Library/Trunk/Diodes/STM_ESD_ESDALC6V1-1U2, ECCN_EU=NEC, ECCN_US=EAR99, Internal_Part_Number=MCD-00170, Part_Type=Diode, Provided_By="SUBCO with ST control", Status=Released
X1 X3: library part MCD-00597, "Oscillator 25Mhz, +-50ppm, Vcc:3.3V typ, square wave: [0.1Vcc;0.9Vcc], Enable pin, SMD", Alternate_Manufacturer=NDK, Alternate_Manufacturer_Part_Number="NZ2520SB 25MHz END4869B", Manufacturer_Part_Number="NZ2520SH 25MHz END4869C", BMS_Part_Number=9157050, ComponentLink1Description=Datasheet, ComponentLink1URL="http://tunmcdsvn.tun.st.com/Component_Datasheet_Library/Trunk/Crystal_Osc/NDK_NZ2520SH 25MHz END4869C", Internal_Part_Number=MCD-00597, Manufacturer=NDK, Part_Type=Crystal_Osc, Provided_By=SUBCO, Status=Released
X2: library part MCD-00091, "Crystal 32.768kHz, 6pF, +-20ppm, 50Kohms max, SMD", Manufacturer=NDK, Manufacturer_Part_Number="NX3215SA 32.768KHz EXS00A-MU00525", BMS_Part_Number=9157034, ComponentLink1Description=Datasheet, ComponentLink1URL="http://tunmcdsvn.tun.st.com/Component_Datasheet_Library/Trunk/Crystal_Osc/NDK_Crystal-For-ST_NX3215SA 32.768KHz EXS00A-MU00525 (EXS10B-21238)", Internal_Part_Number=MCD-00091, Order_Code_Digikey=644-1386, Part_Type=Crystal_Osc, Provided_By=SUBCO, Status=Released

## Free pads (board coordinates)
  round 0.508 on Mech16: 1(47.923,-29.756) 1(96.771,-29.756)

## Via types
v1: diameter 0.45, hole 0.2, Top Layer to Bottom Layer, tented both sides, 1099 vias
v2: diameter 0.25, hole 0.1, Top Layer to Signal Layer 1, tented both sides, 217 vias
v3: diameter 0.25, hole 0.1, Signal Layer 4 to Bottom Layer, tented both sides, 53 vias
v4: diameter 0.6, hole 0.3, Top Layer to Bottom Layer, tented both sides, 9 vias

## Nets (pads, with @x,y where several pads share a name; then routed paths per layer and width w, separated by ;. In a path a pad name is that pad's centre, name@x,y a point inside that pad or via, vN(x,y) a via of type N, cw(c..) or ccw(c..) an arc to the next point about the centre after c; other vN are vias at no path point)
1V8: C74.2 C82.1 C86.1 C93.2 TP4.1 U12.D1 U12.D8 U12.G9 U14.5 | length 15.6
  Top Layer w0.09: 35.575,32.375 36.475,32.375 U12.D8@36.725,32.625
  Top Layer w0.1: U12.D1@40.225,32.625 41.15,32.625 41.288,32.487
  Top Layer w0.2: C74.2@33.95,36.125 34.475,36.125 34.9,35.7 34.9,34.75 35.525,34.125 U12.G9@36.225,34.125 ; C82.1@34.025,31.3 v1(34.775,32.05) 35.25,32.05 35.575,32.375 ; 41.288,32.487 41.75,32.025 41.75,30.425 42.75,29.425 C86.1@43.2,29.425 ; TP4.1@46.9,27.95 v1(47.975,27.95) C93.2@48.9,27.95 ; C93.2@48.9,27.975 U14.5@50.325,27.975
  other v1: 42.4,29.775 34.9,35.275

## Text inside footprints (layer, text, board x,y; h text height)
CN8: Top Overlay "1" at 128.55,10.55 h1.5 r90; Top Overlay "8" at 124.575,30.45 h1.5 r90; M14-Top Assembly "1" at 127.483,12.131 h1.5 r270; M14-Top Assembly "3" at 127.536,17.365 h1.5 r270; M14-Top Assembly "5" at 127.536,22.465 h1.5 r270; M14-Top Assembly "2" at 123.737,14.798 h1.5 r270; M14-Top Assembly "4" at 123.737,19.878 h1.5 r270; M14-Top Assembly "6" at 123.737,24.958 h1.5 r270; M14-Top Assembly "8" at 123.737,30.038 h1.5 r270; M14-Top Assembly "7" at 127.534,27.517 h1.5 r270
CN9: Top Overlay "1" at 76.401,25.29 h1.5 r90; Top Overlay "6" at 80.226,10.59 h1.5 r90; M14-Top Assembly "6" at 80.176,11.623 h1.5 r90; M14-Top Assembly "4" at 80.176,16.703 h1.5 r90; M14-Top Assembly "2" at 80.176,21.783 h1.5 r90; M14-Top Assembly "5" at 76.376,14.115 h1.5 r90; M14-Top Assembly "3" at 76.376,19.215 h1.5 r90; M14-Top Assembly "1" at 76.429,24.45 h1.5 r90
CN10: M14-Top Assembly "2" at 36.425,0.7 h1.5 r90; M14-Top Assembly "3" at 36.425,3.4 h1.5 r90; M14-Top Assembly "6" at 36.375,12.95 h1.5 r90; M14-Top Assembly "5" at 31.975,16.8 h1.5 r90; M14-Top Assembly "4" at 29.075,5.6 h1.5 r90; M14-Top Assembly "7" at 29.075,2.65 h1.5 r90; M7-Top Info "EDGE" at 34.825,-0.725 h1; M7-Top Info "PCB" at 27.225,-0.725 h1
CN11: M14-Top Assembly "2" at 48.75,0.7 h1.5 r90; M14-Top Assembly "3" at 48.75,3.4 h1.5 r90; M14-Top Assembly "6" at 48.7,12.95 h1.5 r90; M14-Top Assembly "5" at 44.3,16.8 h1.5 r90; M14-Top Assembly "4" at 41.4,5.6 h1.5 r90; M14-Top Assembly "7" at 41.4,2.65 h1.5 r90; M7-Top Info "EDGE" at 47.15,-0.725 h1; M7-Top Info "PCB" at 39.55,-0.725 h1
CN12: Top Overlay "1" at 18.928,2.538 h1.5 r90; M14-Top Assembly "1" at 18.978,4.088 h1.5 r90
CN13: Top Overlay "1" at 24.008,2.538 h1.5 r90; M14-Top Assembly "1" at 24.058,4.088 h1.5 r90
CN14: Top Overlay "1" at 87.55,3.85 h1.5; M14-Top Assembly "5" at 82.25,3.625 h1; M14-Top Assembly "1" at 84.95,3.625 h1; M7-Top Info "PCB" at 77.55,-0.55 h0.75; M7-Top Info "EDGE" at 88.2,-0.55 h0.75
CN15: Top Overlay "1" at 110.275,3.625 h1.5; M14-Top Assembly "1" at 113.225,3.55 h1.5; M14-Top Assembly "5" at 115.775,3.55 h1.5; M7-Top Info "EDGE" at 119.125,-0.7 h1; M7-Top Info "PCB" at 108.525,-0.725 h1
CN16: Top Overlay "1" at 50.525,2.975 h1.5; M14-Top Assembly "1" at 52.74,4.1 h1.5 r180; M14-Top Assembly "2" at 55.525,4.075 h1.5 r180
CN17: Top Overlay "1" at 58.725,3.025 h1.5; M14-Top Assembly "1" at 60.99,4.1 h1.5 r180; M14-Top Assembly "2" at 63.775,4.075 h1.5 r180
CN18: Top Overlay "1" at 67.45,2.975 h1.5; M14-Top Assembly "1" at 69.74,4.1 h1.5 r180; M14-Top Assembly "2" at 72.525,4.075 h1.5 r180
CN19: Bottom Overlay "4.3 inch LCD BOARD" at 94.6,30.1 h3.5; M15-Bottom Assembly "4.3 inch LCD BOARD" at 94.565,30.305 h3.5; M15-Bottom Assembly "BOARD MB1046B" at 92.2,15.53 h3.5; M15-Bottom Assembly "1" at 64.125,78.624 h1 r180; M15-Bottom Assembly "50" at 94.3,82.774 h1 r180; M15-Bottom Assembly "49" at 94.275,78.599 h1 r180; M15-Bottom Assembly "2" at 64.05,82.774 h1 r180
CN20: Bottom Overlay "1" at 8.05,49.375 h1.5 r90; M15-Bottom Assembly "1" at 7.303,47.584 h1.2 r270; M15-Bottom Assembly "2" at 6.035,47.487 h1.2 r270; M15-Bottom Assembly "20" at 6.035,35.712 h1.2 r270; M15-Bottom Assembly "19" at 7.31,35.737 h1.2 r270
CN21: M15-Bottom Assembly "2" at 8.604,13.522 h1; M15-Bottom Assembly "3" at 7.334,13.522 h1; M15-Bottom Assembly "4" at 6.125,13.5 h1; M15-Bottom Assembly "5" at 4.775,13.475 h1; M15-Bottom Assembly "6" at 4.744,14.767 h1; M15-Bottom Assembly "7" at 6.014,14.767 h1; M15-Bottom Assembly "8" at 7.334,14.792 h1; M15-Bottom Assembly "9" at 8.604,14.792 h1; M15-Bottom Assembly "10" at 10.141,14.767 h1; M15-Bottom Assembly "1" at 9.824,13.497 h1
D1: Top Overlay "K" at 133.375,84.75 h1.2 r90; M14-Top Assembly "K" at 131.236,84.289 h1 r270; M14-Top Assembly "A" at 131.236,80.639 h1 r270
D2: Top Overlay "K" at 77.511,81.039 h1.2 r90; Top Overlay "K" at 80.775,81.039 h1.2 r90; M14-Top Assembly "K" at 78.925,80.9 h1 r90
D3: M14-Top Assembly "K" at 104.036,78.889 h1.2 r270
D6: M14-Top Assembly "K" at 97.636,60.764 h1.2 r180
D7: M14-Top Assembly "K" at 108.586,53.789 h0.5 r270; M14-Top Assembly "A" at 108.611,49.014 h0.5 r270
D8: M14-Top Assembly "K" at 99.636,32.039 h1.2 r90
D9: M14-Top Assembly "K" at 101.586,32.039 h1.2 r90
D10: M14-Top Assembly "K" at 103.511,32.039 h1.2 r90
D11: M14-Top Assembly "K" at 105.414,32.039 h1.2 r90
JP1: Top Overlay "1" at 64.325,46.55 h1.5; M14-Top Assembly "1" at 62.875,47.5 h1.5 r180
JP2: Top Overlay "1" at 22.95,31.975 h1.5; M14-Top Assembly "1" at 21.426,32.91 h1.5 r180
JP3: Top Overlay "1" at 156.175,17.9 h1.5; M14-Top Assembly "1" at 154.802,19.042 h1.5 r180
JP4: Top Overlay "1" at 56.825,10.05 h1.5; M14-Top Assembly "1" at 55.475,10.975 h1.5 r180
JP5: Top Overlay "1" at 64.75,9.95 h1.5; M14-Top Assembly "1" at 63.475,10.975 h1.5 r180
JP6: Top Overlay "1" at 73.4,10.075 h1.5; M14-Top Assembly "1" at 72.225,10.975 h1.5 r180
JP7: Top Overlay "2" at 106.175,3.325 h1.5; Top Overlay "1" at 106.25,5.4 h1.5; M14-Top Assembly "1" at 104.625,6.55 h1.5 r180; M14-Top Assembly "2" at 104.875,3.975 h1.5 r180; M14-Top Assembly "9" at 94.65,6.525 h1.5 r180; M14-Top Assembly "10" at 95.1,4 h1.5 r180
LD1: M15-Bottom Assembly "K" at 152.9,43.875 h0.75
LD2: M15-Bottom Assembly "K" at 152.9,46.1 h0.75
LD3: M14-Top Assembly "K" at 115.411,13.314 h0.75 r180
LD4: M14-Top Assembly "K" at 80.25,7.725 h0.75 r90
LD5: M14-Top Assembly "K" at 107.861,7.414 h0.75 r90
LD6: Top Overlay "R" at 120.25,13.225 h1.5; Top Overlay "G" at 119.1,13.175 h1.5; M14-Top Assembly "C1" at 120.086,13.689 h0.75 r180; M14-Top Assembly "A1" at 120.086,13.689 h0.75 r180; M14-Top Assembly "A2" at 120.086,13.689 h0.75 r180; M14-Top Assembly "R" at 120.086,13.689 h1.5 r180; M14-Top Assembly "G" at 120.086,13.689 h1.5 r180; M14-Top Assembly "C2" at 120.086,13.689 h0.75 r180
LD7: M14-Top Assembly "K" at 92.101,16.888 h0.75 r180
LD8: M15-Bottom Assembly "K" at 154.475,42.275 h0.75 r180
P1: Bottom Overlay "7" at 29.975,77.2 h1.5; Bottom Overlay "1" at 29.975,74.725 h1.5; M15-Bottom Assembly "7" at 27.775,78.075 h1.5 r180; M15-Bottom Assembly "1" at 27.9,75.675 h1.5 r180; M15-Bottom Assembly "6" at 15.05,75.525 h1.5 r180; M15-Bottom Assembly "12" at 14.725,78.125 h1.5 r180
P2: Bottom Overlay "1" at 9.725,73.525 h1.5 r270; Bottom Overlay "11" at 7.425,73.525 h1.5 r270; M15-Bottom Assembly "20" at 7.475,53.225 h1.5 r270; M15-Bottom Assembly "10" at 9.4,53.25 h1.5 r270; M15-Bottom Assembly "1" at 9.5,71.8 h1.5 r270; M15-Bottom Assembly "11" at 7.475,71.425 h1.5 r270
SW1: Bottom Overlay "1" at 156.625,10.025 h1.5; Bottom Overlay "FLASH" at 149.85,8.875 h1.5; Bottom Overlay "0" at 148.45,10.025 h1.5; M15-Bottom Assembly "2" at 148.931,12.553 h1.5 r270; M15-Bottom Assembly "3" at 154.031,12.578 h1.5 r270; M15-Bottom Assembly "1" at 151.456,12.678 h1.5 r270